# Allegro board BODY.brd
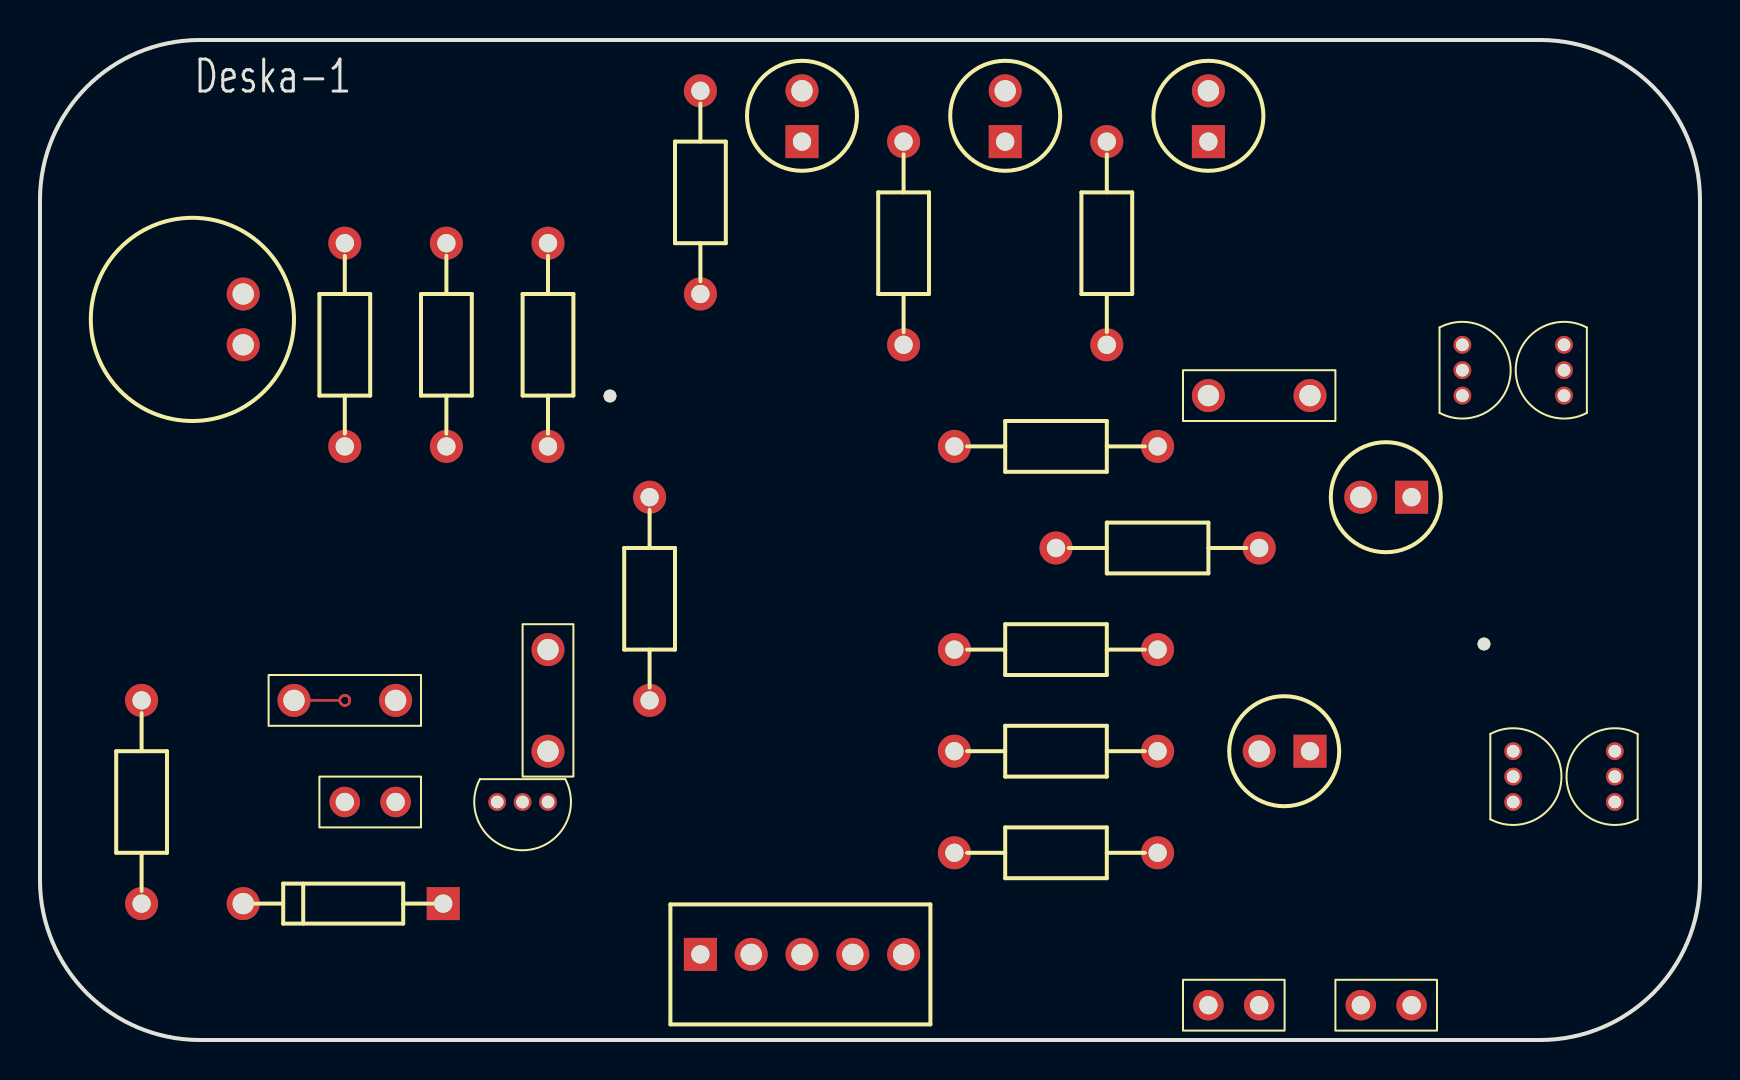
[diagram p0: board, top side]
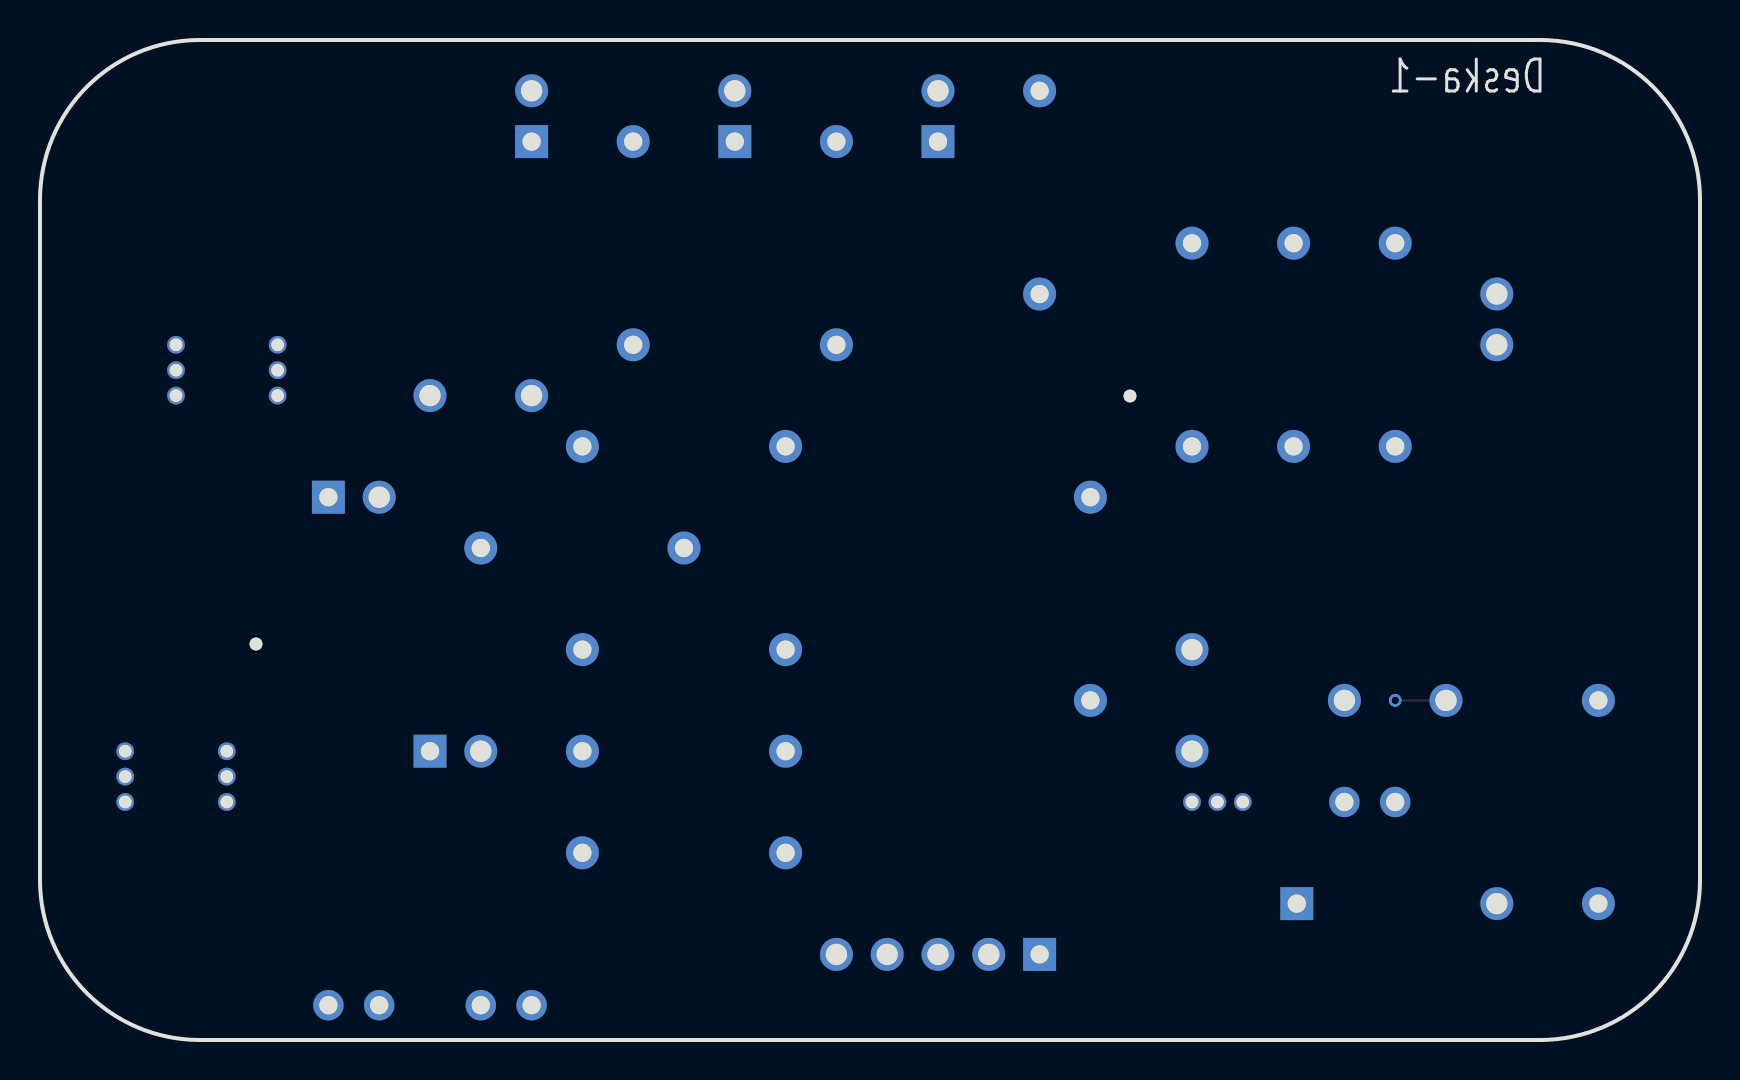
[diagram p1: board, bottom side, seen from below]

Outline 83 x 50 mm; copper layers: TOP, BOTTOM. Coordinates in mm from the lower left corner of the outline.
Outline path: 0,42 0,8 arc(2.34,2.34) 8,0 75,0 arc(80.66,2.34) 83,8 83,42 arc(80.66,47.66) 75,50 8,50 arc(2.34,47.66) 0,42

## Placement (name value [footprint] x y rotation side)
BT1  BATTERY  [JUMPER2]  15.24 11.9 0 top
C1  104  [CAPCK06]  25.4 14.44 0 top
C2  104  [CAPCK06]  17.78 16.98 90 top
C3  11pF  [CAPCK06]  63.5 32.22 90 top
D1  1N4004  [DIODE]  10.16 6.82 0 top
D2  RED  [LEDKA]  48.26 47.46 270 top
D3  RED  [LEDKA]  58.42 47.46 270 top
D4  RED  [LEDKA]  38.1 47.46 270 top
D5  GREEN  [LEDKA]  60.96 14.44 0 top
D6  GREEN  [LEDKA]  66.04 27.14 0 top
J1  5_pins_180_degrees  [HEADER_5]  33.02 4.28 0 top
J2  Right motor  [JUMPER2]  66.04 1.74 0 top
J3  Left motor  [JUMPER2]  58.42 1.74 0 top
MK1  -  [MICROPHONE]  10.16 37.3 270 top
NOREF  -  [unnamed]  28.5 32.2 0 top
NOREF#2  -  [unnamed]  72.2 19.8 0 top
Q1  C1815  [TO92]  25.4 11.9 270 top
Q2  C1815  [TO92]  71.12 34.76 0 top
Q3  C1815  [TO92]  73.66 14.44 0 top
Q4  8050  [TO92]  76.2 32.22 180 top
Q5  8050  [TO92]  78.74 11.9 180 top
R1  560R  [ODPOR]  5.08 16.98 270 top
R2  10k  [ODPOR]  25.4 39.84 270 top
R3  3.3M  [ODPOR]  20.32 39.84 270 top
R4  56k  [ODPOR]  15.24 39.84 270 top
R5  220R  [ODPOR]  50.8 24.6 0 top
R6  220R  [ODPOR]  45.72 19.52 0 top
R7  330R  [ODPOR]  33.02 47.46 270 top
R8  330R  [ODPOR]  43.18 44.92 270 top
R9  330R  [ODPOR]  53.34 44.92 270 top
R10  3.3k  [ODPOR]  55.88 29.68 180 top
R11  220R  [ODPOR]  55.88 9.36 180 top
R12  220R  [ODPOR]  55.88 14.44 180 top
R13  100k  [ODPOR]  30.48 27.14 270 top

## Library data of the parts
BT1 = BATTERY: User Part Number: ***
C1-C3 = C: Tolerance: ***; User Part Number: ***
D1 = DIODE
D2-D6 = LED
J1 = CONN PCB 5-R
J2 J3 = Motor: User Part Number: ***
MK1 = MICROPHONE
Q1-Q5 = 1R1001
R1-R13 = R

## Footprints (pads in the part's own frame, mm; a bottom-side part is the same pattern mirrored in y, then rotated)
CAPCK06
  round 1.651 hole 1.067: 1(0,0) 2(0,5.08)
DIODE
  round 1.651 hole 1.067: 1(0,0)
  rect 1.651x1.651 hole 0.914: 2(10,0)
HEADER_5
  rect 1.651x1.651 hole 0.914: 1(0,0)
  round 1.651 hole 1.067: 2(2.54,0) 3(5.08,0) 4(7.62,0) 5(10.16,0)
JUMPER2
  round 1.524 hole 0.914: 1(0,0) 2(2.54,0)
LEDKA
  round 1.651 hole 1.067: 1(0,0)
  rect 1.651x1.651 hole 0.914: 2(2.54,0)
MICROPHONE
  round 1.651 hole 1.067: 1(0,0) 2(2.54,0)
ODPOR
  round 1.651 hole 0.914: 1(0,0) 2(10.16,0)
TO92
  round 0.889 hole 0.635: 1(0,0) 2(0,-1.27) 3(0,-2.54)
unnamed
  round 0.635 hole 3.175 unplated: (0,0)

## Nets
GND: BT1.2(-) C1.2 C3.2 D2.1(CATHODE) D3.1(CATHODE) D4.1(CATHODE) D5.1(CATHODE) D6.1(CATHODE) J1.5 MK1.1 Q1.3(E) Q4.3(E) Q5.3(E) R1.2
VCC: R2.1 R3.1 R4.1 R10.2 R13.1
N01126: C3.1 R10.1
N01130: C1.1 R13.2
N01134: D4.2(ANODE) R7.1
N01138: D2.2(ANODE) R8.1
N01142: D3.2(ANODE) R9.1
N01146: D1.2(A) J1.1
N01150: BT1.1(+) J2.1(+) J3.1(+)
N01157: D1.1(K)
N01166: C2.1 MK1.2 R1.1 R4.2
N01189: C2.2 Q1.1(B) R3.2
N01198: Q1.2(C) R2.2
N01250: Q2.1(B) R5.2
N01254: D5.2(ANODE) R12.1
N01267: Q3.1(B) R6.2
N01271: Q3.3(E) Q5.1(B)
N01286: J3.2(-) Q3.2(C) Q5.2(C)
N01298: Q2.3(E) Q4.1(B)
N01305: J2.2(-) Q2.2(C) Q4.2(C)
N01562: R12.2
N01583: R5.1 R11.2
N002050: D6.2(ANODE) R11.1
N06854: R9.2
N06861: R8.2
N06873: R7.2
N06952: J1.2
N06956: J1.3
N06960: J1.4

Pads without a net: R6 1

## Via types
v1: diameter 0.61, hole 0.33, TOP to BOTTOM, 6 vias

## Routing (per net, layer and track width the routed paths; a pad name or vN(x,y) marks a point on that pad's centre or on a via; arc(x,y) is an arc through that point)
N01189: length 2.5
  TOP w0.127: C2.2 v1(15.24,16.98)

## Text on the board
Board Geometry/Outline: Deska-1
